# Altium PCB PCB_L0.PcbDoc (part 1 of 2)
Units mm, origin at the board's own origin, x right, y up, seen from the top; angles counter-clockwise.
Board outline 110 x 165 mm, 2 copper layers (Top Layer, Bottom Layer), stack 1.57 mm thick; 80 components, 155 nets, 574 pads, 75 vias.
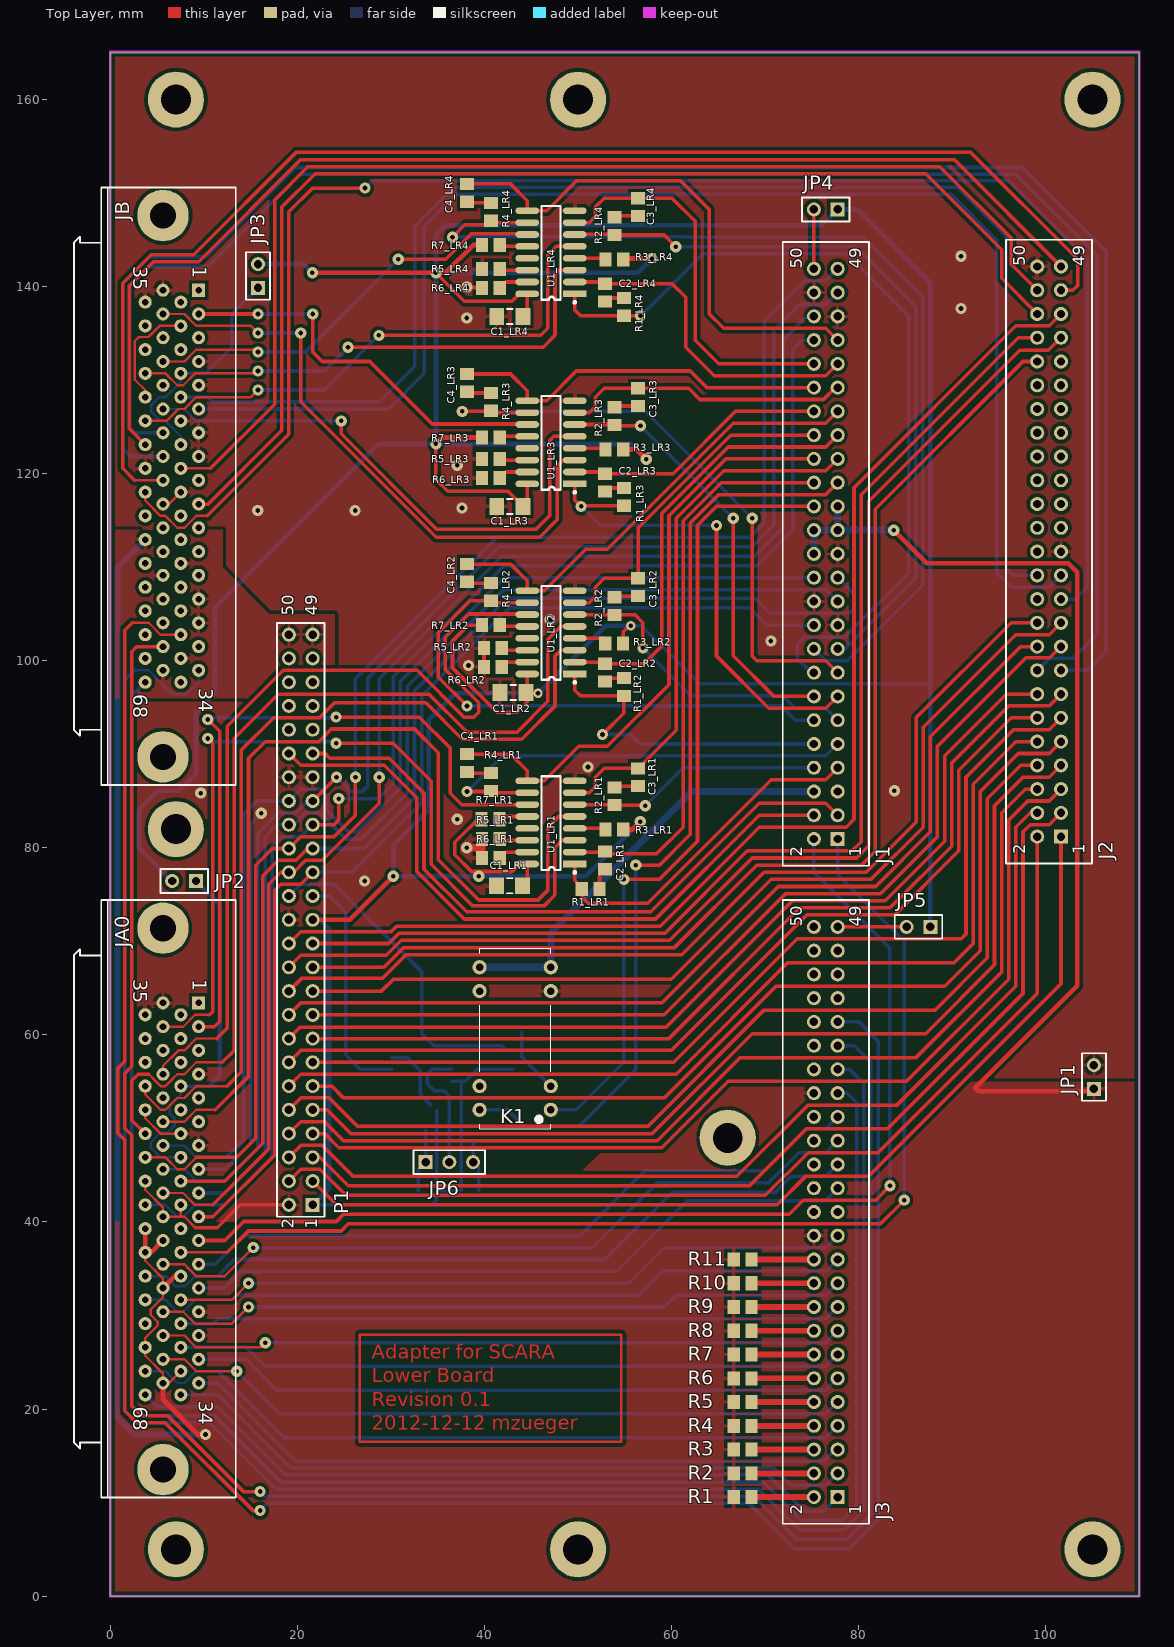
[diagram p0: Top Layer view]
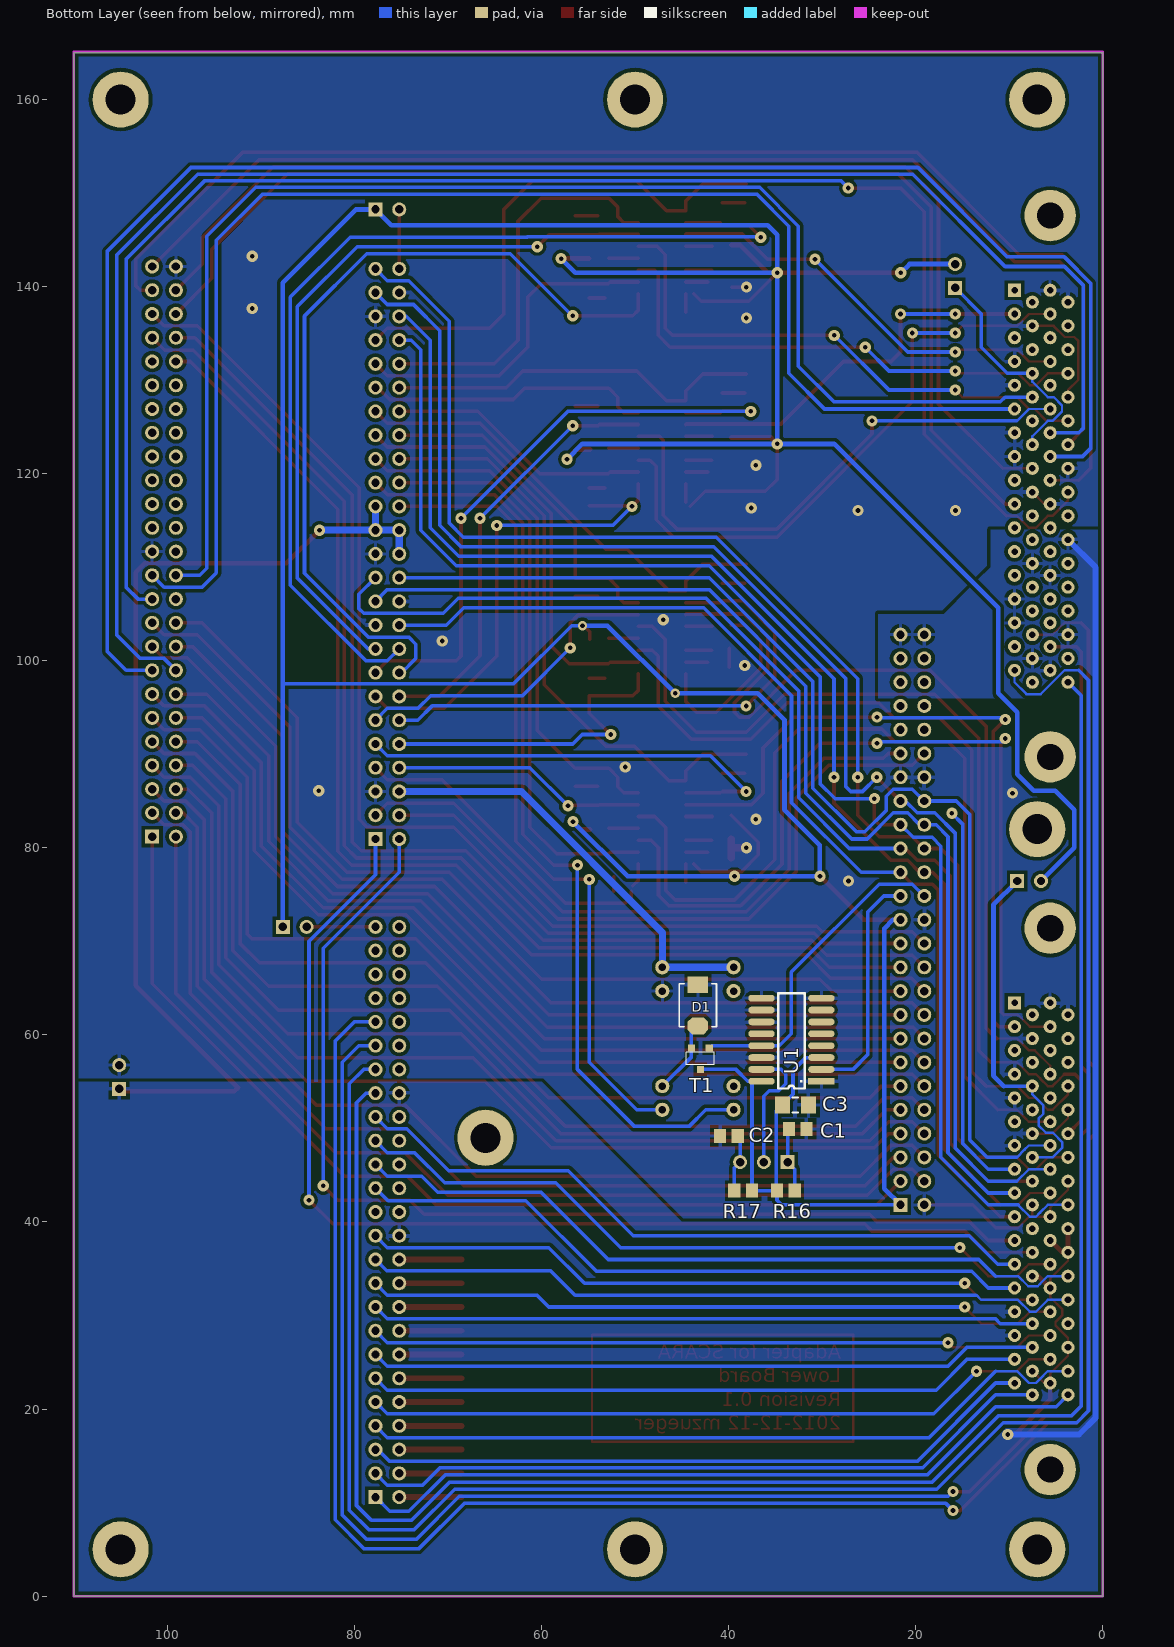
[diagram p1: Bottom Layer view, seen from below]

## Layer stack, top to bottom
Top Layer: signal copper 0.035
Dielectric: core 1.5, FR-4, Dk 4.8
Bottom Layer: signal copper 0.035

## Board outline
0,0 0,165 110,165 110,0 0,0

## Design rules (kind name [scope] priority, off if disabled: settings)
Clearance Polygon [InPolygon] p1: gap=0.381 // General Polygon Clearance
Clearance [All] p2: gap=0.254
FabricationTestPointUsage TestPointUsage [All] p1 off: valid=0 allowmultiple=FALSE
FabricationTestpoint Testpoint [All] p1 off: side=3 testpointundercomponent=TRUE minsize=1.016 maxsize=2.54 preferedsize=1.524 minholesize=0 maxholesize=1.016 preferedholesize=0.813 testpointgrid=0.025 allowsidetop=TRUE allowsidebottom=TRUE usegrid=TRUE gridtolerance=0
FanoutControl Fanout_BGA [IsBGA] p1 off: bgadir=Out bgaviamode=Centered fanoutstyle=Auto fanoutdirection=Alternating viagrid=0.025 // Fanout_BGA (Default Rule)
FanoutControl Fanout_LCC [IsLCC] p2 off: bgadir=Out bgaviamode=Centered fanoutstyle=Auto fanoutdirection=Alternating viagrid=0.025 // Fanout_LCC (Default Rule)
FanoutControl Fanout_SOIC [IsSOIC] p3 off: bgadir=Out bgaviamode=Centered fanoutstyle=Auto fanoutdirection=Alternating viagrid=0.025 // Fanout_SOIC (Default Rule)
FanoutControl Fanout_Small [(CompPinCount < 5)] p4 off: bgadir=Out bgaviamode=Centered fanoutstyle=Auto fanoutdirection=OutThenIn viagrid=0.025 // Fanout_Small (Default Rule)
FanoutControl Fanout_Default [All] p5 off: bgadir=Out bgaviamode=Centered fanoutstyle=Auto fanoutdirection=Alternating viagrid=0.025 // Fanout_Default (Default Rule)
Height [All] p1 off: minheight=0 maxheight=25.4 prefheight=12.7
HoleSize HoleType [IsPad And HasSquareHole] p1: absolutevalues=TRUE maxlimit=0 minlimit=0 maxpercent=80.000 minpercent=20.000 // Find Square Holes
HoleSize [All] p2: absolutevalues=TRUE maxlimit=5 minlimit=0.4 maxpercent=80.000 minpercent=20.000
LayerPairs [All] p1 off: enforce=TRUE
MinimumAnnularRing "Minimum Annular Ring" [All] p1: minimumring=0.2
PasteMaskExpansion [All] p1: expansion=0.05
PolygonConnect PolygonConnectVia [IsVia] p1: connectstyle=Direct reliefconductorwidth=0.254 reliefentries=4 polygonreliefangle="90 Angle" // Direct Connect Via
PolygonConnect [All] p2: connectstyle=Relief reliefconductorwidth=0.381 reliefentries=4 polygonreliefangle="90 Angle"
RoutingCorners [All] p1 off: cornerstyle=45-Degree minsetback=2.54 maxsetback=2.54
RoutingLayers [All] p1 off: top layer_v5=TRUE bottom layer_v5=TRUE
RoutingPriority [All] p1 off: routingpriority=0
RoutingTopology [All] p1 off: topology=Shortest
RoutingVias [All] p1: holewidth=0.4 width=0.6 viastyle="Through Hole" minholewidth=0.3 minwidth=0.7 maxholewidth=2 maxwidth=3.4
SignalStimulus "#Version Information" [All] p1 off: kind=1 level=0 starttime=10.00n stoptime=60.00n periodtime=100.00n // Version 0-9 from 2010-11-01
SilkToSilkClearance [All] p1 off: silktosilkclearance=0.254
SilkscreenOverComponentPads [All] p1: minsilkscreentomaskgap=0
SolderMaskExpansion [All] p1: expansion=0.05
Width [All] p1: maxlimit=2.54 minlimit=0.254 preferedwidth=0.254 minimp=50.000000 maximp=50.000000 favimp=50.000000
11 further rules are at their usual default settings.

## Classes and differential pairs
component class LR1: C1_LR1 C2_LR1 C3_LR1 C4_LR1 R1_LR1 R2_LR1 R3_LR1 R4_LR1 R5_LR1 R6_LR1 R7_LR1 U1_LR1
component class LR2: C1_LR2 C2_LR2 C3_LR2 C4_LR2 R1_LR2 R2_LR2 R3_LR2 R4_LR2 R5_LR2 R6_LR2 R7_LR2 U1_LR2
component class LR3: C1_LR3 C2_LR3 C3_LR3 C4_LR3 R1_LR3 R2_LR3 R3_LR3 R4_LR3 R5_LR3 R6_LR3 R7_LR3 U1_LR3
component class LR4: C1_LR4 C2_LR4 C3_LR4 C4_LR4 R1_LR4 R2_LR4 R3_LR4 R4_LR4 R5_LR4 R6_LR4 R7_LR4 U1_LR4
component class Schematic_L0: J1 J2 J3 JA0 JB JP1 JP2 JP3 JP4 JP5 P1 R1 R2 R3 R4 R5 R6 R7 R8 R9 R10 R11
component class Watchdog: C1 C2 C3 D1 JP6 K1 R16 R17 T1 U1
net class ENC_A+[1..4]: ENC_A+1 ENC_A+2 ENC_A+3 ENC_A+4
net class ENC_A-[1..4]: ENC_A-1 ENC_A-2 ENC_A-3 ENC_A-4
net class ENC_A[1..4]: ENC_A1 ENC_A2 ENC_A3 ENC_A4
net class ENC_B+[1..4]: ENC_B+1 ENC_B+2 ENC_B+3 ENC_B+4
net class ENC_B-[1..4]: ENC_B-1 ENC_B-2 ENC_B-3 ENC_B-4
net class ENC_B[1..4]: ENC_B1 ENC_B2 ENC_B3 ENC_B4
net class ENC_I+[1..4]: ENC_I+1 ENC_I+2 ENC_I+3 ENC_I+4
net class ENC_I-[1..4]: ENC_I-1 ENC_I-2 ENC_I-3 ENC_I-4
net class ENC_I[1..4]: ENC_I1 ENC_I2 ENC_I3 ENC_I4
channel class LineReceiver: LR1 LR2 LR3 LR4

## Components (designator, comment, footprint, x,y, rotation, side; value= is the part's Value field where it differs from the comment)
C1 "100n" 0805 32.61,49.958 r0 bottom
C1_LR1 "100nF" 1206 42.672,75.946 r0 top (schematic designator C1)
C1_LR2 "100nF" 1206 43.05,96.599 r0 top (schematic designator C1)
C1_LR3 "100nF" 1206 42.704,116.506 r0 top (schematic designator C1)
C1_LR4 "100nF" 1206 42.704,136.826 r0 top (schematic designator C1)
C2 "10n" 0805 39.976,49.196 r180 bottom
C2_LR1 "0.1nF" 0805 52.864,78.66 r270 top (schematic designator C2)
C2_LR2 "0.1nF" 0805 52.864,98.726 r270 top (schematic designator C2)
C2_LR3 "0.1nF" 0805 52.864,119.046 r270 top (schematic designator C2)
C2_LR4 "0.1nF" 0805 52.864,139.366 r270 top (schematic designator C2)
C3 "100nF" 1206 32.864,52.498 r0 bottom
C3_LR1 "0.1nF" 0805 56.42,87.55 r270 top (schematic designator C3)
C3_LR2 "0.1nF" 0805 56.42,107.87 r270 top (schematic designator C3)
C3_LR3 "0.1nF" 0805 56.42,128.19 r270 top (schematic designator C3)
C3_LR4 "0.1nF" 0805 56.42,148.51 r270 top (schematic designator C3)
C4_LR1 "0.1nF" 0805 38.132,89.074 r270 top (schematic designator C4)
C4_LR2 "0.1nF" 0805 38.132,109.394 r270 top (schematic designator C4)
C4_LR3 "0.1nF" 0805 38.132,129.714 r270 top (schematic designator C4)
C4_LR4 "0.1nF" 0805 38.132,150.034 r270 top (schematic designator C4)
D1 "1N4007" SMD-DO214AC 43.278,63.166 r90 bottom
J1 "Header 2x25" "Header - 2x25 - Boxed" 77.756,80.946 r90 top
J2 "Header 2x25" "Header - 2x25 - Boxed" 101.632,81.2 r90 top
J3 "Header 2x25" "Header - 2x25 - Boxed" 77.756,10.588 r90 top
JA0 "har.mik" "HAR-MIK P/S 68 SA" 9.43,63.42 r270 top
JB "har.mik" "HAR-MIK P/S 68 SA" 9.43,139.62 r270 top
JP1 "Header 1x2" "Header - 1x2 - V" 105.156,54.229 r90 top
JP2 "Header 1x2" "Header - 1x2 - V" 9.144,76.454 r180 top
JP3 "Header 1x2" "Header - 1x2 - V" 15.78,139.874 r90 top
JP4 "Header 1x2" "Header - 1x2 - V" 77.756,148.256 r180 top
JP5 "Header 1x2" "Header - 1x2 - V" 87.662,71.548 r180 top
JP6 "Header 3x1" "Header - 1x3 - V" 33.692,46.402 r0 top
K1 "8L41" 8L41 47.088,51.99 r180 top
P1 "Header 2x25" "Header - 2x25 - V" 21.622,41.83 r90 top
R1 "0" 0805 67.596,10.588 r180 top
R1_LR1 "120R" 0805 51.34,75.612 r180 top (schematic designator R1)
R1_LR2 "120R" 0805 54.896,97.202 r270 top (schematic designator R1)
R1_LR3 "120R" 0805 54.896,117.522 r270 top (schematic designator R1)
R1_LR4 "120R" 0805 54.896,137.842 r270 top (schematic designator R1)
R2 "0" 0805 67.596,13.128 r180 top
R2_LR1 "120R" 0805 53.88,85.518 r270 top (schematic designator R2)
R2_LR2 "120R" 0805 53.88,105.838 r270 top (schematic designator R2)
R2_LR3 "120R" 0805 53.88,126.158 r270 top (schematic designator R2)
R2_LR4 "120R" 0805 53.88,146.478 r270 top (schematic designator R2)
R3 "0" 0805 67.596,15.668 r180 top
R3_LR1 "1k" 0805 53.88,81.962 r0 top (schematic designator R3)
R3_LR2 "1k" 0805 53.848,101.854 r0 top (schematic designator R3)
R3_LR3 "1k" 0805 53.88,122.602 r0 top (schematic designator R3)
R3_LR4 "1k" 0805 53.88,142.922 r0 top (schematic designator R3)
R4 "0" 0805 67.596,18.208 r180 top
R4_LR1 "120R" 0805 40.672,87.042 r270 top (schematic designator R4)
R4_LR2 "120R" 0805 40.672,107.362 r270 top (schematic designator R4)
R4_LR3 "120R" 0805 40.672,127.682 r270 top (schematic designator R4)
R4_LR4 "120R" 0805 40.672,148.002 r270 top (schematic designator R4)
R5 "0" 0805 67.596,20.748 r180 top
R5_LR1 "0E" 0805 40.672,80.946 r180 top (schematic designator R5)
R5_LR2 "0E" 0805 40.894,101.346 r180 top (schematic designator R5)
R5_LR3 "0E" 0805 40.672,121.586 r180 top (schematic designator R5)
R5_LR4 "0E" 0805 40.672,141.906 r180 top (schematic designator R5)
R6 "0" 0805 67.596,23.288 r180 top
R6_LR1 "0E" 0805 40.672,78.914 r180 top (schematic designator R6)
R6_LR2 "0E" 0805 40.894,99.314 r180 top (schematic designator R6)
R6_LR3 "0E" 0805 40.672,119.554 r180 top (schematic designator R6)
R6_LR4 "0E" 0805 40.672,139.874 r180 top (schematic designator R6)
R7 "0" 0805 67.596,25.828 r180 top
R7_LR1 "1k" 0805 40.64,83.058 r180 top (schematic designator R7)
R7_LR2 "1k" 0805 40.672,103.806 r180 top (schematic designator R7)
R7_LR3 "1k" 0805 40.672,123.872 r180 top (schematic designator R7)
R7_LR4 "1k" 0805 40.672,144.446 r180 top (schematic designator R7)
R8 "0" 0805 67.596,28.368 r180 top
R9 "0" 0805 67.596,30.908 r180 top
R10 "0" 0805 67.596,33.448 r180 top
R11 "0" 0805 67.596,35.988 r180 top
R16 "100k" 0805 33.88,43.354 r0 bottom
R17 "120k" 0805 38.452,43.354 r180 bottom
T1 "BCR141" SOT23-3Pin 43.024,56.308 r0 bottom
U1 "CD74HCT123M" SO16-W 30.085,55.038 r0 bottom
U1_LR1 "SN75175D" SO16-M 49.644,78.272 r180 top (schematic designator U1)
U1_LR2 "SN75175D" SO16-M 49.644,98.592 r180 top (schematic designator U1)
U1_LR3 "SN75175D" SO16-M 49.644,118.912 r180 top (schematic designator U1)
U1_LR4 "SN75175D" SO16-M 49.644,139.232 r180 top (schematic designator U1)

## Footprints (in the part's own frame and the unit in brackets; to place one, negate y for a bottom-side part, rotate by r counter-clockwise, add the part's x,y. Pads: shape width x height; smd on the part's side, far side on the other; paste and mask are expansions set on the pad)
8L41 [mil] "Reed Relais, 2.54mm"
  round 60 hole 31.5: 1(0,0) 2(0,-100) 6(0,-500) 7(0,-600) 8(300,-600) 9(300,-500) 13(300,-100) 14(300,0)
  silkscreen extent 0,-680 300,80
0805 [mm] "SMD Chip 0805 mil or 2012 mm"
  rect 1.3x1.5 smd: 1(-0.95,0) 2(0.95,0)
1206 [mm] "SMD Chip 1206 mil or 3216 mm"
  rect 1.6x1.8 smd: 1(-1.4,0) 2(1.4,0)
  silkscreen extent -0.3,-0.8 0.3,0.8
"HAR-MIK P/S 68 SA" [mm] "HAR-MIK P/S Connector, 68 Pin, 90 deg"
  rect 1.4x1.4 hole 0.7: 1(0,0)
  round 1.4 hole 0.7: 2(1.27,-1.905) 3(2.54,0) 4(3.81,-1.905) 5(5.08,0) 6(6.35,-1.905) 7(7.62,0) 8(8.89,-1.905) 9(10.16,0) 10(11.43,-1.905) 11(12.7,0) 12(13.97,-1.905) 13(15.24,0) 14(16.51,-1.905) 15(17.78,0) 16(19.05,-1.905) 17(20.32,0) 18(21.59,-1.905) 19(22.86,0) 20(24.13,-1.905) 21(25.4,0) 22(26.67,-1.905) 23(27.94,0) 24(29.21,-1.905) 25(30.48,0) 26(31.75,-1.905) 27(33.02,0) 28(34.29,-1.905) 29(35.56,0) 30(36.83,-1.905) 31(38.1,0) 32(39.37,-1.905) 33(40.64,0) 34(41.91,-1.905) 35(0,-3.81) 36(1.27,-5.715) 37(2.54,-3.81) 38(3.81,-5.715) 39(5.08,-3.81) 40(6.35,-5.715) 41(7.62,-3.81) 42(8.89,-5.715) 43(10.16,-3.81) 44(11.43,-5.715) 45(12.7,-3.81) 46(13.97,-5.715) 47(15.24,-3.81) 48(16.51,-5.715) 49(17.78,-3.81) 50(19.05,-5.715) 51(20.32,-3.81) 52(21.59,-5.715) 53(22.86,-3.81) 54(24.13,-5.715) 55(25.4,-3.81) 56(26.67,-5.715) 57(27.94,-3.81) 58(29.21,-5.715) 59(30.48,-3.81) 60(31.75,-5.715) 61(33.02,-3.81) 62(34.29,-5.715) 63(35.56,-3.81) 64(36.83,-5.715) 65(38.1,-3.81) 66(39.37,-5.715) 67(40.64,-3.81) 68(41.91,-5.715)
  round 5.5 hole 2.8: ""(-7.985,-3.81) ""(49.895,-3.81)
  silkscreen extent -10.98,-13.33 52.89,3.97
"Header - 1x2 - V" [mm] "Connector; Header; 1x2"
  rect 1.5x1.5 hole 0.9: 1(0,0)
  round 1.5 hole 0.9: 2(2.54,0)
  silkscreen extent -1.27,-1.27 3.81,1.27
"Header - 1x3 - V" [mm] "Connector; Header; 1x3"
  rect 1.5x1.5 hole 0.9: 1(0,0)
  round 1.5 hole 0.9: 2(2.54,0) 3(5.08,0)
  silkscreen extent -1.27,-1.27 6.35,1.27
"Header - 2x25 - Boxed" [mm] "Connector; Header; 2x25"
  rect 1.5x1.5 hole 0.9: 1(0,0)
  round 1.5 hole 0.9: 2(0,2.54) 3(2.54,0) 4(2.54,2.54) 5(5.08,0) 6(5.08,2.54) 7(7.62,0) 8(7.62,2.54) 9(10.16,0) 10(10.16,2.54) 11(12.7,0) 12(12.7,2.54) 13(15.24,0) 14(15.24,2.54) 15(17.78,0) 16(17.78,2.54) 17(20.32,0) 18(20.32,2.54) 19(22.86,0) 20(22.86,2.54) 21(25.4,0) 22(25.4,2.54) 23(27.94,0) 24(27.94,2.54) 25(30.48,0) 26(30.48,2.54) 27(33.02,0) 28(33.02,2.54) 29(35.56,0) 30(35.56,2.54) 31(38.1,0) 32(38.1,2.54) 33(40.64,0) 34(40.64,2.54) 35(43.18,0) 36(43.18,2.54) 37(45.72,0) 38(45.72,2.54) 39(48.26,0) 40(48.26,2.54) 41(50.8,0) 42(50.8,2.54) 43(53.34,0) 44(53.34,2.54) 45(55.88,0) 46(55.88,2.54) 47(58.42,0) 48(58.42,2.54) 49(60.96,0) 50(60.96,2.54)
  silkscreen extent -2.86,-3.33 63.82,5.87
"Header - 2x25 - V" [mm] "Connector; Header; 2x25"
  rect 1.5x1.5 hole 0.9: 1(0,0)
  round 1.5 hole 0.9: 2(0,2.54) 3(2.54,0) 4(2.54,2.54) 5(5.08,0) 6(5.08,2.54) 7(7.62,0) 8(7.62,2.54) 9(10.16,0) 10(10.16,2.54) 11(12.7,0) 12(12.7,2.54) 13(15.24,0) 14(15.24,2.54) 15(17.78,0) 16(17.78,2.54) 17(20.32,0) 18(20.32,2.54) 19(22.86,0) 20(22.86,2.54) 21(25.4,0) 22(25.4,2.54) 23(27.94,0) 24(27.94,2.54) 25(30.48,0) 26(30.48,2.54) 27(33.02,0) 28(33.02,2.54) 29(35.56,0) 30(35.56,2.54) 31(38.1,0) 32(38.1,2.54) 33(40.64,0) 34(40.64,2.54) 35(43.18,0) 36(43.18,2.54) 37(45.72,0) 38(45.72,2.54) 39(48.26,0) 40(48.26,2.54) 41(50.8,0) 42(50.8,2.54) 43(53.34,0) 44(53.34,2.54) 45(55.88,0) 46(55.88,2.54) 47(58.42,0) 48(58.42,2.54) 49(60.96,0) 50(60.96,2.54)
  silkscreen extent -1.27,-1.27 62.23,3.81
SMD-DO214AC [mm] "Diode; Body 5.4mm x 3.6mm x 2.5mm (LxBXH)"
  oct 1.8x2.2 smd: 1(-2.2,0)
  rect 1.8x2.2 smd: 2(2.2,0)
  silkscreen extent -2.3,-2 2.3,2
SO16-M [mil] "SOIC, 14-Leads, Pitch 1.27mm, IPC Low Density"
  rect 99x28 smd: 1(0,0)
  oval 99x28 smd: 2(0,-50) 3(0,-100) 4(0,-150) 5(0,-200) 6(0,-250) 7(0,-300) 8(0,-350) 9(200,-350) 10(200,-300) 11(200,-250) 12(200,-200) 13(200,-150) 14(200,-100) 15(200,-50) 16(200,0)
  silkscreen extent -5,-370 140,40, body extent 18,-370 171,21, height 69
SO16-W [mil] "Wide small outline integrated circuit, 16 pin"
  rect 111x28 smd: 1(0,0)
  oval 111x28 smd: 2(0,-50) 3(0,-100) 4(0,-150) 5(0,-200) 6(0,-250) 7(0,-300) 8(0,-350) 9(252,-350) 10(252,-300) 11(252,-250) 12(252,-200) 13(252,-150) 14(252,-100) 15(252,-50) 16(252,0)
  silkscreen extent 70,-370 182,30
SOT23-3Pin [mm]
  rect 0.76x0.76 smd: 1(-0.953,-2.29) 2(0.953,-2.29) 3(0,0)
  silkscreen extent -1.5,-1.81 1.5,-0.48

## Part data
C1 C1_LR1 C1_LR2 C1_LR3 C1_LR4 C2 C2_LR1 C2_LR2 C2_LR3 C2_LR4 C3 C3_LR1 C3_LR2 C3_LR3 C3_LR4 C4_LR1 C4_LR2 C4_LR3 C4_LR4: library part C, "Capacitor"
D1: library part 1N4148, "High Conductance Fast Diode"
J1 J2 J3 P1: "Header, 25-Pin, Dual row"
JA0 JB: library part "Connector 68", "TB 60 01 068 5232"
JP1 JP2 JP3 JP4 JP5: library part Jumper
JP6: library part "Header 3", "Header, 3-Pin"
K1: "Reed Relais"
R1 R1_LR1 R1_LR2 R1_LR3 R1_LR4 R2 R2_LR1 R2_LR2 R2_LR3 R2_LR4 R3 R3_LR1 R3_LR2 R3_LR3 R3_LR4 R4 R4_LR1 R4_LR2 R4_LR3 R4_LR4 R5 R5_LR1 R5_LR2 R5_LR3 R5_LR4 R6 R6_LR1 R6_LR2 R6_LR3 R6_LR4 R7 R7_LR1 R7_LR2 R7_LR3 R7_LR4 R8 R9 R10 R11 R16 R17: library part R, "Resistor"
T1: "General Purpose NPN Transistor"
U1: "Multivibrator"
U1_LR1 U1_LR2 U1_LR3 U1_LR4: "TEXAS INSTRUMENTS - SN75175D - LINE RECEIVER,QUAD RS485/422/423"

## Free pads (board coordinates)
  round 6 hole 3.2: 0(7,5) 0(7,82) 0(7,160) 0(50,5) 0(50,160) 0(66,49) 0(105,5) 0(105,160)

## Via types
v1: diameter 1.2, hole 0.5, Top Layer to Bottom Layer, 71 vias
v2: diameter 1, hole 0.5, Top Layer to Bottom Layer, 2 vias
v3: diameter 1.2, hole 0.5, Top Layer to Bottom Layer, tented top, 1 vias
v4: diameter 1.2, hole 0.5, Top Layer to Bottom Layer, tented bottom, 1 vias

## Nets (pads, with @x,y where several pads share a name; then routed paths per layer and width w, separated by ;. In a path a pad name is that pad's centre, name@x,y a point inside that pad or via, vN(x,y) a via of type N, cw(c..) or ccw(c..) an arc to the next point about the centre after c; other vN are vias at no path point)
AGND: J1.26 J1.27 J1.28 J1.29 J3.24 J3.36 JA0.24 JA0.27 JA0.29 JA0.32 JA0.54 JA0.55 JA0.56 JA0.59 JA0.64 JA0.67 JB.24 JB.27 JB.29 JB.32 JB.56 JB.59 JB.64 JB.67 JP1.1 P1.49 P1.50 R1.2 R2.2 R3.2 R4.2 R5.2 R6.2 R7.2 R8.2 R9.2 R10.2 R11.2 | length 247.7
  Top Layer w0.254: JA0.56@3.715,36.75 3.715,35.856 5.62,33.951 JA0.59@5.62,32.94 5.62,31.956 4.318,30.654 4.318,30.056 5.054,29.32 5.054,28.93 3.715,27.591 JA0.64@3.715,26.59 3.715,25.696 5.62,23.791 JA0.67@5.62,22.78 6.255,22.78 JA0.32@7.525,24.05
  Top Layer w0.508: JA0.54@3.715,39.29 JA0.56@3.715,36.75 4.35,36.75 JA0.55@5.62,38.02 ; JA0.67@5.62,22.78 5.62,21.05 9.398,17.272 v1(10.16,17.272) ; JA0.59@5.62,32.94 6.89,34.21 JA0.24@7.525,34.21 ; v1(83.74,113.966) 87.284,110.422 102.43,110.422 103.378,109.474 103.378,65.278 92.456,54.356 92.839,53.973 JP1.1@105.027,53.973 ; JP1.1@104.898,54.102 JP1.1@105.027,53.973 ; JP1.1@105.154,53.846 JP1.1@105.027,53.973
  Bottom Layer w0.635: JB.56@3.715,112.95 0.762,109.997 0.762,19.05 2.54,17.272 v1(10.16,17.272)
  Bottom Layer w0.762: J1.26@75.216,111.426 J1.28@75.216,113.966 J1.27@77.756,113.966 ; J1.29@77.756,116.506 J1.27@77.756,113.966 ; v1(83.74,113.966) J1.27@77.756,113.966
BLOWOFF: J2.15 JB.49 | length 184.8
  Bottom Layer w0.381: JB.49@5.62,121.84 2.16,121.84 1.302,122.698 1.302,140.382 4.096,143.176 10.192,143.176 19.757,152.741 97.481,152.741 106.458,143.764 106.458,101.012 104.426,98.98 J2.15@101.632,98.98
BRAKE_1: J1.20 JA0.19 P1.29 | length 116.8
  Top Layer w0.381: JA0.19@9.43,40.56 10.954,40.56 17.558,47.164 17.558,75.47 18.208,76.12 20.352,76.12 P1.29@21.622,77.39
  Bottom Layer w0.381: P1.29@21.622,77.39 25.828,77.39 33.274,84.836 33.274,96.266 42.672,105.664 68.326,105.664 70.184,103.806 J1.20@75.216,103.806
BRAKE_2: J1.46 JA0.51 P1.30 | length 145.6
  Top Layer w0.254: JA0.51@5.62,43.1 7.784,43.1 9.054,41.83 10.954,41.83
  Top Layer w0.381: 10.954,41.83 16.923,47.799 16.923,76.105 18.208,77.39 P1.30@19.082,77.39 19.59,77.39 20.86,78.66 22.638,78.66 28.734,84.756 v1(28.734,87.55)
  Bottom Layer w0.381: v1(28.734,87.55) 28.734,98.076 41.83,111.172 68.866,111.172 71.914,114.22 71.914,134.286 74.454,136.826 J1.46@75.216,136.826
BRAKE_3: J1.23 JA0.16 P1.31 | length 126.2
  Top Layer w0.381: JA0.16@7.525,44.37 12.224,44.37 16.288,48.434 16.288,76.994 17.954,78.66 19.844,78.66 21.114,79.93 P1.31@21.622,79.93
  Bottom Layer w0.381: P1.31@21.622,79.93 27.098,79.93 32.512,85.344 32.512,96.774 42.418,106.68 68.913,106.68 70.517,105.076 79.026,105.076 79.534,105.584 79.534,107.108 J1.23@77.756,108.886
BRAKE_4: J1.49 JA0.48 P1.32 | length 152.7
  Top Layer w0.254: JA0.48@3.715,46.91 5.879,46.91 7.149,45.64 7.901,45.64 9.171,46.91
  Top Layer w0.381: 9.171,46.91 13.494,46.91 15.526,48.942 15.526,78.152 17.304,79.93 P1.32@19.082,79.93 20.352,81.2 23.908,81.2 26.194,83.486 v1(26.194,87.55)
  Bottom Layer w0.381: v1(26.194,87.55) 26.194,98.076 41.322,113.204 68.358,113.204 69.882,114.728 69.882,136.318 74.2,140.636 76.486,140.636 J1.49@77.756,141.906
DGND: C1.1 C1_LR1.1 C1_LR2.1 C1_LR3.1 C1_LR4.1 C2.1 C3.1 D1.2 J1.5 J1.19 J1.22 J1.25 J1.45 J1.48 J2.25 J2.50 JA0.4 JA0.7 JA0.9 JA0.12 JA0.13 JA0.15 JA0.18 JA0.35 JA0.36 JA0.44 JA0.50 JA0.53 JB.4 JB.7 JB.9 JB.12 JB.13 JB.15 JB.18 JB.35 JB.36 JB.44 JB.50 JB.53 JP1.2 K1.6 P1.2 P1.26 P1.37 P1.38 R5_LR1.2 R5_LR2.2 R5_LR3.2 R5_LR4.2 R6_LR1.2 R6_LR2.2 R6_LR3.2 R6_LR4.2 U1.1 U1.8 U1.9 U1.10 U1.11 U1.14 U1_LR1.8 U1_LR2.8 U1_LR3.8 U1_LR4.8 | length 90.5
  Top Layer w0.254: JA0.50@3.715,44.37 3.715,43.449 5.62,41.544 JA0.53@5.62,40.56 7.901,40.56 9.091,39.37 ; JA0.44@3.715,51.99 3.715,51.096 5.361,49.45 JA0.12@7.525,49.45 ; JB.44@3.715,128.19 3.715,128.937 2.603,130.048 2.603,134.175 3.048,134.62 4.064,134.62 5.254,135.81 JB.4@7.525,135.81 ; JB.53@5.62,116.76 6.255,116.76 JB.18@7.525,118.03 ; 7.525,40.621 JA0.18@7.525,41.83
  Top Layer w0.381: 9.091,39.37 11.43,39.37 13.89,41.83 P1.2@19.082,41.83 ; v1(38.1,139.954) R6_LR4.2@39.642,139.954 ; R6_LR2.2@39.944,99.314 R5_LR2.2@39.944,101.346
  Top Layer w0.762: v1(38.1,80.01) 39.722,80.01 ; R6_LR1.2@39.722,78.914 39.722,80.01 ; R5_LR1.2@39.722,80.946 39.722,80.01
  Bottom Layer w0.381: JA0.15@9.43,45.64 12.224,45.64 14.986,48.402 14.986,82.55 v1(16.129,83.693) v1@16.256,83.566
  other v1: 27.178,76.454 37.084,83.058 9.652,85.852 83.82,86.106 51.054,88.646 38.278,99.492 70.612,102.108 46.99,104.394 15.748,116.078 26.162,116.078 37.592,116.332 37.084,120.904 38.1,136.652 90.932,137.668 90.932,143.256
EN_1: J1.44 JA0.52 P1.33 | length 149.5
  Top Layer w0.381: P1.33@21.622,82.47 23.908,82.47 24.416,82.978 v1(24.416,85.264)
  Bottom Layer w0.254: JA0.52@3.715,41.83 5.879,41.83 6.701,41.008 6.701,41.003 7.144,40.56 7.784,40.56 9.054,41.83
  Bottom Layer w0.381: 9.054,41.83 12.224,41.83 17.304,46.91 17.304,80.184 18.244,81.125 20.276,81.125 P1.33@21.622,82.47 ; v1@24.588,85.256 28.614,85.256 30.226,86.868 30.226,98.298 42.084,110.156 69.12,110.156 72.93,113.966 72.93,133.27 73.946,134.286 J1.44@75.216,134.286
EN_2: J1.21 JA0.17 P1.34 | length 124.4
  Bottom Layer w0.381: JA0.17@9.43,43.1 12.224,43.1 16.542,47.418 16.542,81.2 17.812,82.47 P1.34@19.082,82.47 19.59,82.47 20.86,83.74 22.384,83.74 25.178,80.946 26.844,80.946 31.75,85.852 31.75,97.282 42.084,107.616 76.486,107.616 J1.21@77.756,106.346
EN_3: J1.47 JA0.49 P1.35 | length 151.9
  Top Layer w0.381: P1.35@21.622,85.01 v1(24.162,87.55)
  Bottom Layer w0.254: JA0.49@5.62,45.64 7.901,45.64 9.171,44.37
  Bottom Layer w0.381: 9.171,44.37 12.224,44.37 15.748,47.894 15.748,81.534 17.954,83.74 19.844,83.74 21.114,85.01 P1.35@21.622,85.01 ; v1(24.162,87.55) 25.686,86.026 26.956,86.026 27.493,86.563 27.493,98.105 41.576,112.188 68.612,112.188 70.898,114.474 70.898,135.302 73.692,138.096 76.486,138.096 J1.47@77.756,139.366
EN_4: J1.24 JA0.47 P1.36 | length 127.6
  Bottom Layer w0.254: JA0.47@5.62,48.18 7.906,48.18 8.349,47.737 8.349,47.732 9.171,46.91
  Bottom Layer w0.381: 9.171,46.91 12.366,46.91 14.224,48.768 14.224,83.566 15.668,85.01 P1.36@19.082,85.01 20.352,86.28 22.384,86.28 23.146,85.518 23.146,83.994 25.432,81.708 26.336,81.708 30.988,86.36 30.988,97.79 42.084,108.886 J1.24@75.216,108.886
ENC_A1: JA0.37 U1_LR1.3 | length 93.1
  Top Layer w0.254: JA0.37@5.62,60.88 7.784,60.88 9.054,62.15 10.588,62.15
  Top Layer w0.381: v1(10.414,91.694) 10.922,91.186 10.922,62.484 10.588,62.15 ; v1(24.13,91.186) 30.226,91.186 34.29,87.122 34.29,78.232 38.735,73.787 46.355,73.787 47.498,74.93 47.498,80.01 48.3,80.812 U1_LR1.3@49.644,80.812
  Bottom Layer w0.381: v1(10.414,91.694) 10.748,91.36 23.956,91.36 v1(24.13,91.186)
ENC_A2: JA0.42 U1_LR2.3 | length 94.4
  Top Layer w0.254: JA0.42@3.715,54.53 3.715,53.636 5.361,51.99 5.879,51.99 7.149,53.26 7.901,53.26 9.171,54.53 12.478,54.53
  Top Layer w0.381: 12.478,54.53 14.002,56.054 14.002,90.456 17.446,93.9 22.36,93.9 23.964,95.504 33.734,95.504 37.624,91.614 43.974,91.614 47.53,95.17 47.53,100.504 48.158,101.132 U1_LR2.3@49.644,101.132
ENC_A3: JB.37 U1_LR3.3 | length 65.1
  Top Layer w0.254: JB.37@5.62,137.08 7.901,137.08 9.171,135.81 15.018,135.81 v1(15.78,135.048)
  Top Layer w0.381: v1@20.098,135.048 20.352,134.794 20.352,127.682 34.83,113.204 45.894,113.204 47.752,115.062 47.752,120.792 48.412,121.452 U1_LR3.3@49.644,121.452
  Bottom Layer w0.381: v1(15.78,135.048) v1(20.352,135.048)
ENC_A4: JB.42 U1_LR4.3 | length 55.3
  Top Layer w0.254: JB.42@3.715,130.73 5.879,130.73 7.149,129.46 7.784,129.46 9.054,130.73 v1@15.78,130.73
  Top Layer w0.381: v1(25.4,133.524) 46.26,133.524 47.53,134.794 47.53,141.398 47.904,141.772 U1_LR4.3@49.644,141.772
  Bottom Layer w0.381: v1(15.78,130.984) 22.86,130.984 v1(25.4,133.524)
ENC_A+1: J1.7 R1_LR1.2 U1_LR1.1 | length 36.8
  Top Layer w0.381: U1_LR1.1@49.644,78.272 49.644,76.546 R1_LR1.2@50.258,75.932 ; R1_LR1.2@50.39,75.358 50.39,74.784 51.086,74.088 57.436,74.088 70.644,87.296 76.486,87.296 J1.7@77.756,88.566
ENC_A+2: J1.10 R1_LR2.2 U1_LR2.1 | length 35.3
  Top Layer w0.381: U1_LR2.1@49.644,98.592 49.644,96.866 50.258,96.252 R1_LR2.2@54.896,96.252 54.896,94.408 v1(52.61,92.122)
  Bottom Layer w0.381: v1(52.61,92.122) 55.658,92.122 56.674,91.106 J1.10@75.216,91.106
ENC_A+3: J1.13 R1_LR3.2 U1_LR3.1 | length 52.6
  Top Layer w0.381: U1_LR3.1@49.644,118.912 49.644,117.186 50.258,116.572 R1_LR3.2@54.896,116.572 ; v1@65.056,114.474 v1(64.802,114.474) 64.802,100.504 70.39,94.916 76.486,94.916 J1.13@77.756,96.186
  Bottom Layer w0.381: v1(50.324,116.506) 52.356,114.474 v1(64.802,114.474)
ENC_A+4: J1.16 R1_LR4.2 U1_LR4.1 | length 89.7
  Top Layer w0.381: U1_LR4.1@49.644,139.232 49.644,137.506 50.258,136.892 R1_LR4.2@54.896,136.892 v1(56.674,136.892)
  Bottom Layer w0.381: v1(56.674,136.892) 56.674,136.826 63.358,143.51 78.692,143.51 85.344,136.858 85.344,109.362 78.518,102.536 74.2,102.536 73.438,101.774 73.438,100.25 74.962,98.726 J1.16@75.216,98.726
ENC_A-1: C2_LR1.1 J1.32 U1_LR1.2 | length 61
  Top Layer w0.381: U1_LR1.2@49.644,79.542 C2_LR1.1@52.678,79.542 ; C2_LR1.1@52.864,79.356 58.386,79.356 61.246,82.216 61.246,114.982 65.31,119.046 J1.32@75.216,119.046
ENC_A-2: C2_LR2.1 J1.35 U1_LR2.2 | length 46.3
  Top Layer w0.381: U1_LR2.2@49.644,99.862 C2_LR2.1@52.678,99.862 ; C2_LR2.1@52.864,99.676 57.052,99.676 58.96,101.584 58.96,115.744 66.072,122.856 76.486,122.856 J1.35@77.756,124.126
ENC_A-3: C2_LR3.1 J1.38 U1_LR3.2 | length 28.1
  Top Layer w0.381: U1_LR3.2@49.644,120.182 C2_LR3.1@52.678,120.182 ; C2_LR3.1@52.864,119.996 60.164,119.996 66.834,126.666 J1.38@75.216,126.666
ENC_A-4: C2_LR4.1 J1.41 U1_LR4.2 | length 35.7
  Top Layer w0.381: U1_LR4.2@49.644,140.502 C2_LR4.1@52.678,140.502 ; C2_LR4.1@52.864,140.316 60.042,140.316 61.5,138.858 61.5,133.524 64.548,130.476 76.486,130.476 J1.41@77.756,131.746
ENC_B1: JA0.45 U1_LR1.5 | length 103.3
  Top Layer w0.254: JA0.45@5.62,50.72 7.906,50.72 8.349,51.163 8.349,51.168 9.171,51.99 11.208,51.99
  Top Layer w0.381: 11.208,51.99 14.764,55.546 14.764,89.582 16.542,91.36 22.272,91.36 23.622,92.71 32.512,92.71 35.052,90.17 35.052,78.74 39.37,74.422 45.72,74.422 46.736,75.438 46.736,82.184 47.904,83.352 U1_LR1.5@49.644,83.352
ENC_B2: JA0.46 U1_LR2.5 | length 101.6
  Top Layer w0.254: 4.096,55.8 4.539,55.357 4.539,55.352 5.361,54.53 5.879,54.53 6.701,55.352 6.701,55.357 7.144,55.8 7.901,55.8 9.171,57.07 11.97,57.07
  Top Layer w0.381: JA0.46@3.715,49.45 2.286,50.879 2.286,55.118 2.968,55.8 4.096,55.8 ; 11.97,57.07 13.24,58.34 13.24,91.726 17.954,96.44 34.068,96.44 38.132,92.376 43.466,92.376 46.768,95.678 46.768,102.282 48.158,103.672 U1_LR2.5@49.644,103.672
ENC_B3: JB.45 U1_LR3.5 | length 59
  Top Layer w0.381: v1(24.67,125.65) 24.67,124.262 34.886,114.046 45.466,114.046 46.99,115.57 46.99,123.586 47.396,123.992 U1_LR3.5@49.644,123.992
  Bottom Layer w0.254: JB.45@5.62,126.92 7.901,126.92 9.171,125.65
  Bottom Layer w0.381: 9.171,125.65 v1(24.67,125.65)
ENC_B4: JB.46 U1_LR4.5 | length 58.3
  Top Layer w0.254: JB.46@3.715,125.65 5.996,125.65 7.266,126.92 7.901,126.92 9.171,128.19 15.018,128.19 v1(15.78,128.952)
  Top Layer w0.381: v1(28.702,134.794) 46.006,134.794 46.768,135.556 46.768,143.43 47.65,144.312 U1_LR4.5@49.644,144.312
  Bottom Layer w0.381: v1(15.78,128.952) 22.86,128.952 v1(28.702,134.794)
ENC_B+1: J1.8 R2_LR1.2 U1_LR1.6 | length 27.2
  Top Layer w0.381: U1_LR1.6@49.644,84.622 R2_LR1.2@53.826,84.622 ; R2_LR1.2@53.88,84.568 v3@57.182,84.568
  Bottom Layer w0.381: v3(57.182,84.502) 61.246,88.566 J1.8@75.216,88.566
ENC_B+2: J1.11 R2_LR2.2 U1_LR2.6 | length 34.4
  Top Layer w0.381: U1_LR2.6@49.644,104.942 56.046,104.942 56.928,104.06 v1(56.928,101.378)
  Bottom Layer w0.381: v1(56.928,101.378) 62.04,96.266 71.862,96.266 73.212,94.916 76.486,94.916 J1.11@77.756,93.646
ENC_B+3: J1.14 R2_LR3.2 U1_LR3.6 | length 45.5
  Top Layer w0.381: U1_LR3.6@49.644,125.262 R2_LR3.2@53.826,125.262 ; R2_LR3.2@53.946,125.142 v1(56.674,125.142) ; v1@66.58,114.728 66.58,100.552 70.946,96.186 J1.14@75.216,96.186
  Bottom Layer w0.381: v1(56.674,125.142) v1(66.58,115.236)
ENC_B+4: J1.17 R2_LR4.2 U1_LR4.6 | length 80.1
  Top Layer w0.381: U1_LR4.6@49.644,145.582 R2_LR4.2@53.826,145.582 ; R2_LR4.2@53.88,145.528 59.196,145.528 v1(60.452,144.272)
  Bottom Layer w0.381: v1(60.452,144.272) 79.708,144.272 86.106,137.874 86.106,108.854 78.518,101.266 J1.17@77.756,101.266
ENC_B-1: C3_LR1.1 J1.33 U1_LR1.7 | length 56.8
  Top Layer w0.381: U1_LR1.7@49.644,85.892 51.206,85.892 51.848,86.534 51.848,87.55 52.798,88.5 C3_LR1.1@56.42,88.5 60.484,92.564 60.484,115.236 65.564,120.316 76.486,120.316 J1.33@77.756,121.586
ENC_B-2: C3_LR2.1 J1.36 U1_LR2.7 | length 36.8
  Top Layer w0.381: U1_LR2.7@49.644,106.212 51.206,106.212 51.848,106.854 51.848,107.87 52.798,108.82 C3_LR2.1@56.42,108.82 56.42,114.22 66.326,124.126 J1.36@75.216,124.126
ENC_B-3: C3_LR3.1 J1.39 U1_LR3.7 | length 30.8
  Top Layer w0.381: U1_LR3.7@49.644,126.532 51.206,126.532 51.848,127.174 51.848,128.19 52.798,129.14 C3_LR3.1@56.42,129.14 61.82,129.14 63.024,127.936 76.232,127.936 77.502,129.206 J1.39@77.756,129.206
ENC_B-4: C3_LR4.1 J1.42 U1_LR4.7 | length 42
  Top Layer w0.381: U1_LR4.7@49.644,146.852 51.206,146.852 51.848,147.494 51.848,148.51 52.798,149.46 C3_LR4.1@56.42,149.46 60.042,149.46 62.516,146.986 62.516,134.286 65.056,131.746 J1.42@75.216,131.746
ENC_I1: JA0.3 U1_LR1.11 | length 76.2
  Top Layer w0.381: JA0.3@9.43,60.88 11.096,60.88 11.684,61.468 11.684,92.456 v1(10.414,93.726) ; v1(24.13,93.98) 33.02,93.98 36.322,90.678 36.322,85.852 37.552,84.622 U1_LR1.11@44.564,84.622
  Bottom Layer w0.381: v1(10.414,93.726) 10.58,93.892 v1@24.13,93.892
ENC_I2: JA0.41 U1_LR2.11 | length 92.6
  Top Layer w0.254: JA0.41@5.62,55.8 5.62,56.694 7.266,58.34 7.901,58.34 9.171,59.61 11.35,59.61
  Top Layer w0.381: 11.35,59.61 12.478,60.738 12.478,92.996 18.462,98.98 32.798,98.98 37.798,93.98 38.862,93.98 39.37,94.488 39.37,95.504 35.814,99.06 35.814,102.504 38.31,105.001 44.505,105.001 U1_LR2.11@44.564,104.942
ENC_I3: JB.3 U1_LR3.11 | length 42.4
  Top Layer w0.381: JB.3@9.43,137.08 v1(15.78,137.08) ; v1(21.622,137.08) 21.622,133.016 22.638,132 27.718,132 34.397,125.321 44.505,125.321 U1_LR3.11@44.564,125.262
  Bottom Layer w0.381: v1(15.78,137.08) v1(21.622,137.08)